# EAGLE board kinesis-advantage-v2 (EAGLE 6.3)
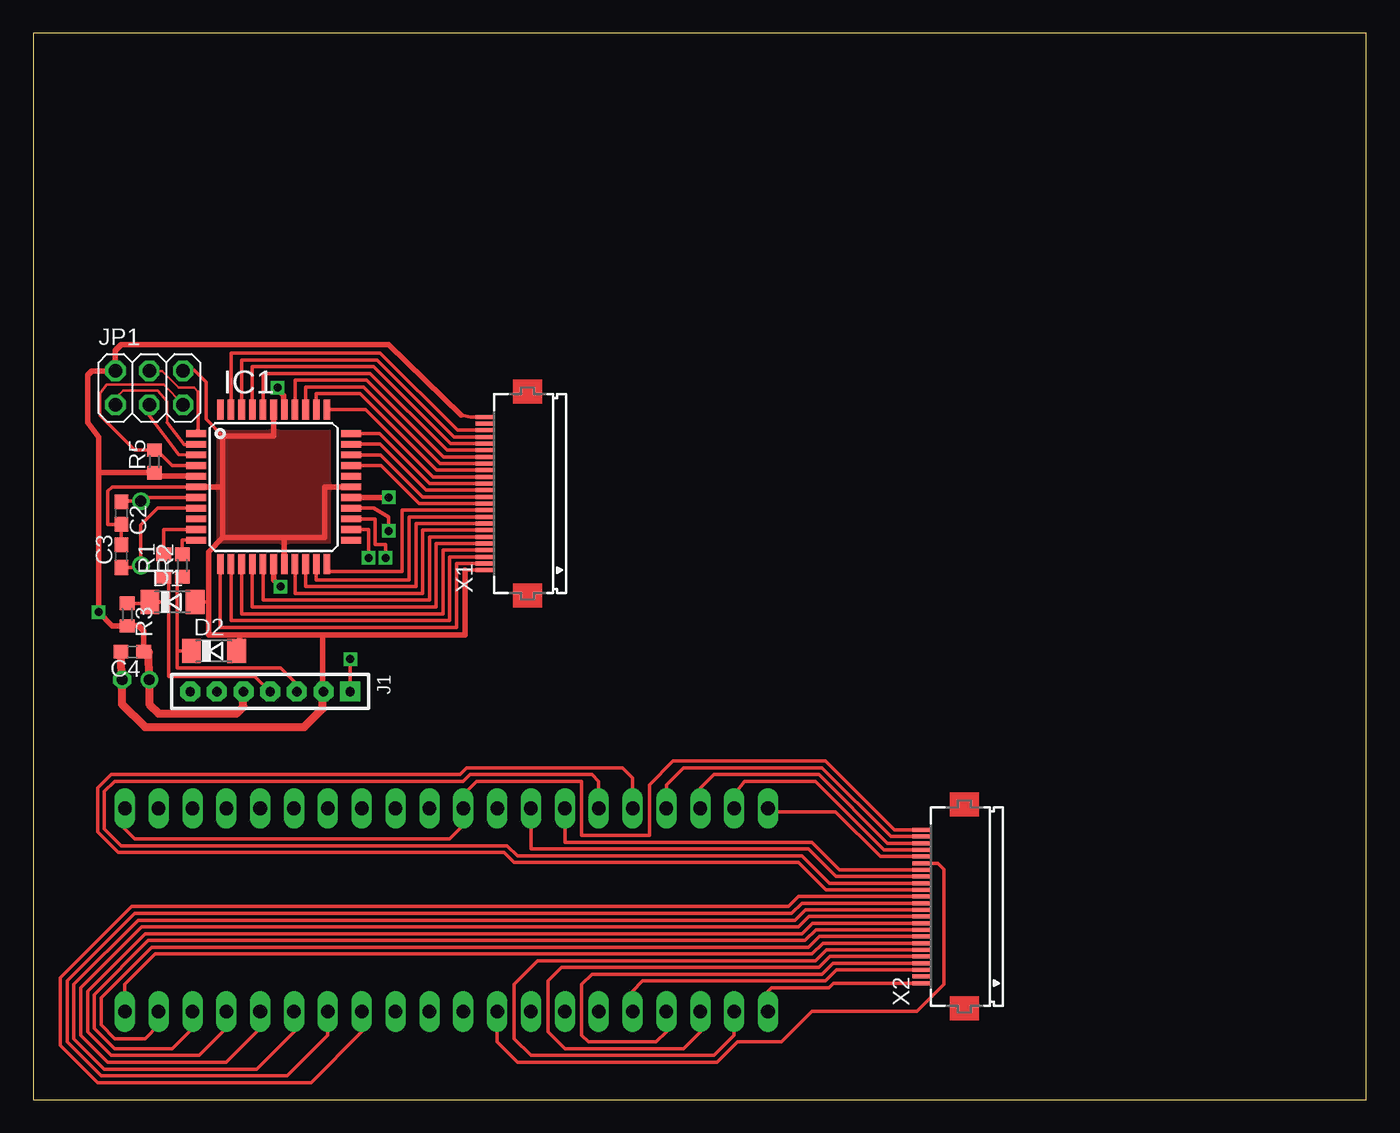
[diagram p0: board, top side]
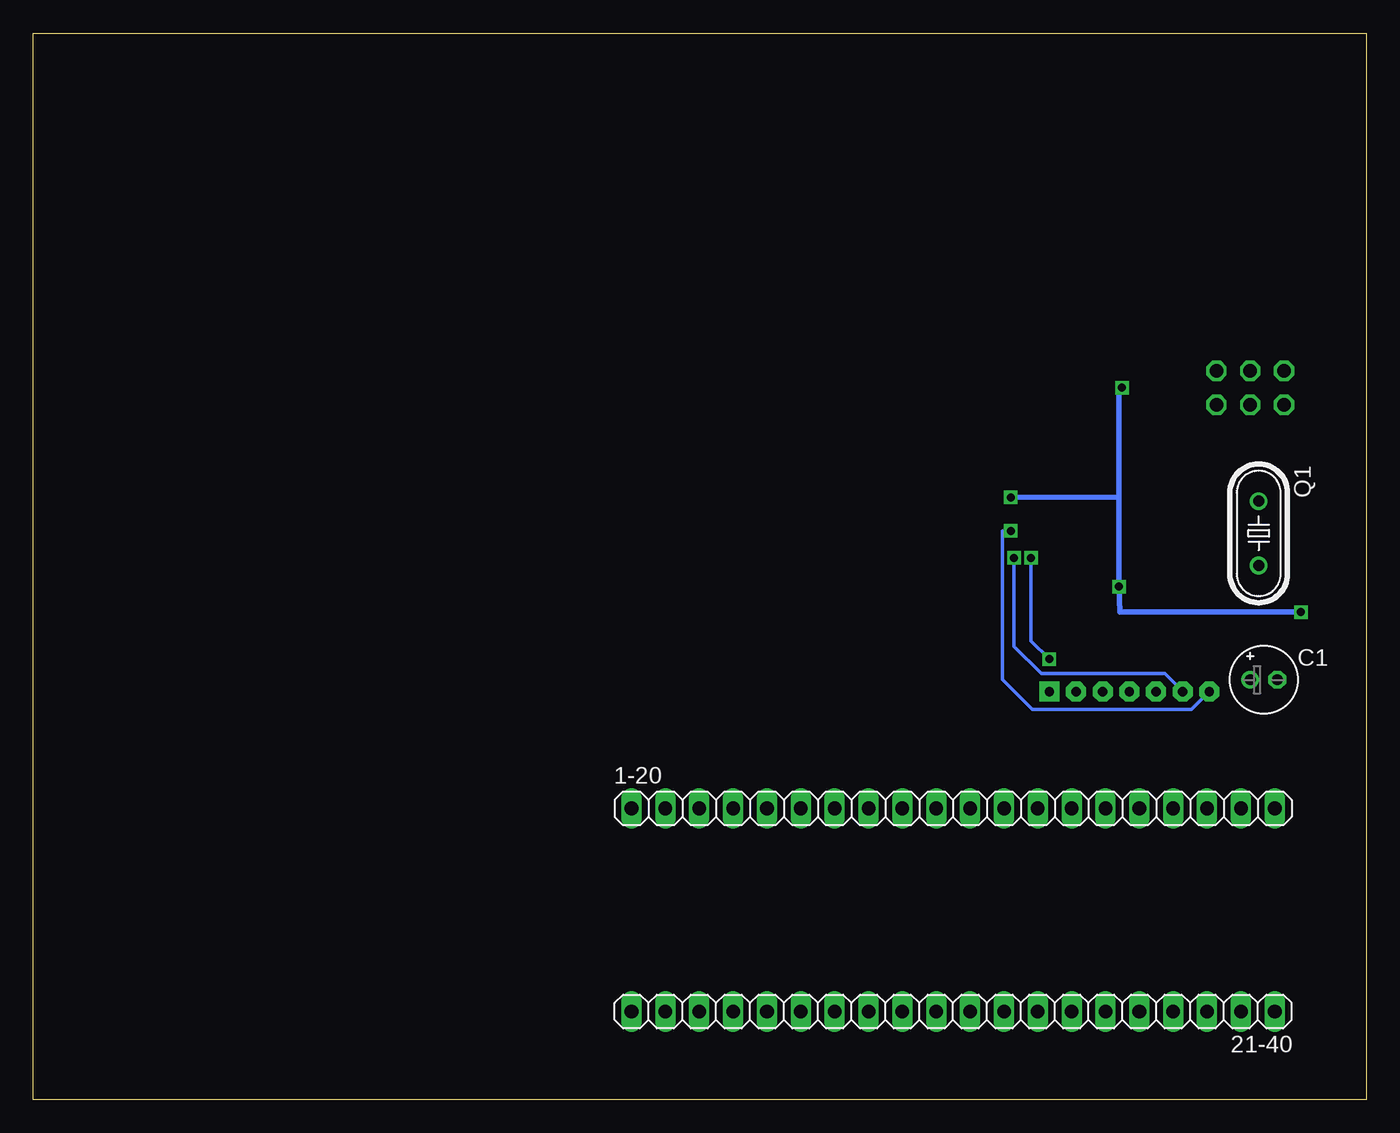
[diagram p1: board, bottom side, seen from below]

Size 100 x 80 mm. Coordinates in mm from the lower left corner, seen from the top.
Outline: 0,0 100,0 100,80 0,80 0,0
Copper layers (1*16): Top 0.035mm / dielectric 1.5mm / Bottom 0.035mm
Design rules "default *": minimum track width 8mil, minimum drill 12mil, track to track 6mil, track to pad 6mil, pad to pad 6mil, via to via 8mil, smd to smd 4mil, copper to edge 40mil, drill to drill 8mil, minimum pad ring 10mil, minimum via ring 8mil, stop-mask expansion 4mil, vias tented up to drill 0mil, thermal gap 10mil

## Footprints (pad centres in the part's own frame; a part is rotated, then mirrored left to right if it is on the bottom)
1X20 = drill 1.016 long: 1 -24.13,0; 2 -21.59,0; 3 -19.05,0; 4 -16.51,0; 5 -13.97,0; 6 -11.43,0; 7 -8.89,0; 8 -6.35,0; 9 -3.81,0; 10 -1.27,0; 11 1.27,0; 12 3.81,0; 13 6.35,0; 14 8.89,0; 15 11.43,0; 16 13.97,0; 17 16.51,0; 18 19.05,0; 19 21.59,0; 20 24.13,0
E2-5 = drill 0.813 pad 1.27: + -1.016,0 | drill 0.813 pad 1.27 octagon: - 1.016,0
C0603 = smd 1.1 x 1: 1 -0.85,0; 2 0.85,0
SOD80C = smd 1.4 x 1.8: A 1.7,0; C -1.7,0
TQFP44 = smd 1.5 x 0.5: 1 -5.8,4; 2 -5.8,3.2; 3 -5.8,2.4; 4 -5.8,1.6; 5 -5.8,0.8; 6 -5.8,0; 7 -5.8,-0.8; 8 -5.8,-1.6; 9 -5.8,-2.4; 10 -5.8,-3.2; 11 -5.8,-4; 23 5.8,-4; 24 5.8,-3.2; 25 5.8,-2.4; 26 5.8,-1.6; 27 5.8,-0.8; 28 5.8,0; 29 5.8,0.8; 30 5.8,1.6; 31 5.8,2.4; 32 5.8,3.2; 33 5.8,4 | smd 0.5 x 1.5: 12 -4,-5.8; 13 -3.2,-5.8; 14 -2.4,-5.8; 15 -1.6,-5.8; 16 -0.8,-5.8; 17 0,-5.8; 18 0.8,-5.8; 19 1.6,-5.8; 20 2.4,-5.8; 21 3.2,-5.8; 22 4,-5.8; 34 4,5.8; 35 3.2,5.8; 36 2.4,5.8; 37 1.6,5.8; 38 0.8,5.8; 39 0,5.8; 40 -0.8,5.8; 41 -1.6,5.8; 42 -2.4,5.8; 43 -3.2,5.8; 44 -4,5.8
SIP-100-07-32 = drill 0.7 pad 1.5 square: 1 -7,0 | drill 0.7 pad 1.5 octagon: 2 -5,0; 3 -3,0; 4 -1,0; 5 1,0; 6 3,0; 7 5,0
2X03 = drill 1.016 octagon: 1 -2.54,-1.27; 2 -2.54,1.27; 3 0,-1.27; 4 0,1.27; 5 2.54,-1.27; 6 2.54,1.27
HC49/S = drill 0.813: 1 -2.413,0; 2 2.413,0
R0603 = smd 1 x 1.1: 1 -0.85,0; 2 0.85,0
FH12-24S-0.5SH = smd 0.3 x 1.3: 1 -5.75,3.25; 2 -5.25,3.25; 3 -4.75,3.25; 4 -4.25,3.25; 5 -3.75,3.25; 6 -3.25,3.25; 7 -2.75,3.25; 8 -2.25,3.25; 9 -1.75,3.25; 10 -1.25,3.25; 11 -0.75,3.25; 12 -0.25,3.25; 13 0.25,3.25; 14 0.75,3.25; 15 1.25,3.25; 16 1.75,3.25; 17 2.25,3.25; 18 2.75,3.25; 19 3.25,3.25; 20 3.75,3.25; 21 4.25,3.25; 22 4.75,3.25; 23 5.25,3.25; 24 5.75,3.25

## Placement (x,y rotation side)
1-20  1-20  [1X20]  30.99,21.84 0 bottom
21-40  21-40  [1X20]  30.99,6.6 180 bottom
C1  4u7  [E2-5]  7.68,31.5 0 bottom
C2  27p  [C0603]  6.6,44.01 270 top
C3  27p  [C0603]  6.6,40.77 90 top
C4  100n  [C0603]  7.43,33.59 180 top
D1  3.6v  [SOD80C]  10.44,37.34 0 top
D2  3.6v  [SOD80C]  13.55,33.66 0 top
IC1  MEGA16-A  [TQFP44]  18.03,45.97 0 top
J1  F-1X07-SIP-100-32  [SIP-100-07-32]  16.76,30.61 180 top
JP1  Programmer  [2X03]  8.7,53.4 0 top
Q1  16mhz  [HC49/S]  8.06,42.48 270 bottom
R1  68R  [R0603]  9.78,40.07 90 top
R2  68R  [R0603]  11.18,40.07 90 top
R3  1k5  [R0603]  7.05,36.39 270 top
R5  4k7  [R0603]  9.08,47.88 90 top
X1  FH12-24S-0.5SH  [FH12-24S-0.5SH]  37.08,45.47 90 top
X2  FH12-24S-0.5SH  [FH12-24S-0.5SH]  69.85,14.48 90 top

## Library data of the parts
1-20 21-40 JP1 = pinhead
C1-C4 R1-R3 R5 = rcl
D1 D2 = diode
IC1 = atmel; MPN: ATMEGA16-16AU; OC_FARNELL: 9171134; OC_NEWARK: 96K6515
J1 = con-headers-jp
Q1 = crystal; OC_FARNELL: 1667008; OC_NEWARK: unknown
X1 X2 = con-hirose; MPN: FH12-24S-0.5SH(55); OC_FARNELL: 1324552; OC_NEWARK: 34M6170

## Nets
BUZZER: IC1.16 X1.6
CAPS_LED: IC1.12 X1.2
CHIP-D+: IC1.11 R2.2
CHIP-D-: IC1.10 R1.2
D+: D2.C J1.3 R2.1
D-: D1.C J1.4 R1.1 R3.1
EEP_SCL: IC1.19 X1.7
EEP_SDA: IC1.20 X1.8
FS1: IC1.25 J1.6
FS2: IC1.26 J1.7
FS3: IC1.24 J1.1
GND: C1.- C2.2 C3.2 C4.2 D1.A D2.A IC1.6 IC1.18 IC1.28 IC1.39 J1.2 JP1.6 X1.1
KBD_BUZZER: 21-40.12 X2.19
KBD_CAPS_LED: 1-20.4 X2.23
KBD_EEP_SCL: 1-20.7 X2.18
KBD_EEP_SDA: 1-20.8 X2.17
KBD_GND: 1-20.10 1-20.20 X2.24
KBD_KPD: 1-20.5 X2.15
KBD_KPD_LED: 1-20.3 X2.22
KBD_MATRIX1: 21-40.1 X2.7
KBD_MATRIX2: 21-40.2 X2.8
KBD_MATRIX3: 21-40.3 X2.9
KBD_MATRIX4: 21-40.4 X2.10
KBD_MATRIX5: 21-40.5 X2.11
KBD_MATRIX6: 21-40.6 X2.12
KBD_MATRIX7: 21-40.7 X2.13
KBD_MATRIX8: 21-40.8 X2.14
KBD_NUM_LED: 1-20.1 X2.20
KBD_P138_A: 21-40.19 X2.6
KBD_P138_B: 21-40.18 X2.5
KBD_P138_C: 21-40.17 X2.4
KBD_P138_SEL: 21-40.16 X2.3
KBD_PGM: 1-20.6 X2.16
KBD_SCR_LED: 1-20.2 X2.21
KBD_VCC: 21-40.20 X2.1
KPD: IC1.22 X1.10
KPD_LED: IC1.13 X1.3
MATRIX1: IC1.37 X1.18
MATRIX2: IC1.36 X1.17
MATRIX3: IC1.35 X1.16
MATRIX4: IC1.34 X1.15
MATRIX5: IC1.33 X1.14
MATRIX6: IC1.32 X1.13
MATRIX7: IC1.31 X1.12
MATRIX8: IC1.30 X1.11
MISO: IC1.2 JP1.1
MOSI: IC1.1 JP1.4
NUM_LED: IC1.15 X1.5
P138_A: IC1.40 X1.19
P138_B: IC1.41 X1.20
P138_C: IC1.42 X1.21
P138_SEL: IC1.43 X1.22
PGM: IC1.21 X1.9
PIN9: C2.1 IC1.7 Q1.1
PIN10: C3.1 IC1.8 Q1.2
RST: IC1.4 JP1.5 R5.2
SCK: IC1.3 JP1.3
SCR_LED: IC1.14 X1.4
VCC: C1.+ C4.1 IC1.5 IC1.17 IC1.27 IC1.38 J1.5 JP1.2 R3.2 R5.1 X1.24

## Tracks (layer width: path | path; a pad name or v marks a point on that pad's centre or on a via)
BUZZER
  Top 0.254: 17.34,40.07 IC1.16 17.23,37.47 29.72,37.47 29.72,42.22 X1.6
CAPS_LED
  Top 0.254: X1.2 31.75,40.22 31.75,35.43 14.03,35.43 IC1.12
CHIP-D+
  Top 0.254: IC1.11 11.18,41.97 R2.2
CHIP-D-
  Top 0.254: R1.2 9.78,42.77 IC1.10
D+
  Top 0.254: 10.79,33.66 10.79,32.38 18.54,32.38 19.76,31.16 J1.3 | D2.C 10.79,33.66 | R2.1 10.79,39.22 10.79,33.66
D-
  Top 0.254: 10.16,37.34 D1.C 8.64,37.24 R3.1 | 10.16,37.34 10.16,31.75 16.62,31.75 J1.4 | R1.1 10.16,39.22 10.16,37.34
EEP_SCL
  Top 0.254: X1.7 29.21,42.72 29.21,37.97 19.63,37.97 IC1.19
EEP_SDA
  Top 0.254: X1.8 28.7,43.22 28.7,38.48 20.43,38.48 IC1.20
FS1  (via drill 0.6)
  Top 0.254: IC1.25 25.64,43.57 25.65,41.66 26.42,41.66 v26.42,40.64
  Bottom 0.254: v26.42,40.64 26.42,33.98 24.38,31.95 15.11,31.95 J1.6
FS2  (via drill 0.6)
  Top 0.254: IC1.26 25.53,44.37 26.67,43.69 v26.67,42.67
  Bottom 0.254: v26.67,42.67 27.3,42.67 27.3,31.52 25.04,29.26 13.13,29.26 11.79,30.61 J1.7
FS3  (via drill 0.6, 0.61)
  Top 0.254: IC1.24 25.15,42.77 v25.15,40.64 | v23.77,33.05 23.77,30.61 J1.1
  Bottom 0.254: v25.15,40.64 25.15,34.42 v23.77,33.05
GND
  Top 0.254: D1.A 13.14,37.34 | IC1.6 5.91,45.97 5.59,45.66 5.59,43.16 C2.2 C3.2 | 14.22,49.78 12.95,51.05 12.95,53.85 12.06,54.74 11.3,54.74 JP1.6 | X1.1 32.38,39.72 | D2.A 15.49,33.78
  Top 0.406: 21.72,34.86 32.38,34.86 32.38,39.72 | IC1.18 18.83,42.16 | 18.83,42.16 14.22,42.16 | 14.22,42.16 13.14,41.08 13.14,37.34 13.14,34.86 15.49,34.86 | IC1.6 14.22,45.97 | 14.22,45.97 14.22,42.16 | 14.22,45.97 14.22,49.78 18.03,49.78 IC1.39 | IC1.28 21.84,45.97 21.84,42.16 18.83,42.16 | 21.72,34.86 21.72,30.48 21.76,30.53 J1.2 | 21.72,34.86 15.49,34.86 | 15.49,33.78 15.49,34.86
  Top 0.61: 21.72,30.48 21.72,29.34 20.32,27.94 8.38,27.94 6.67,29.65 C1.- 6.58,32.6 C4.2
  pour Top (isolate 0.762): 22.67,41.34 13.46,41.34 13.53,50.74 22.73,50.8
KBD_BUZZER
  Top 0.254: X2.19 67.87,17.73 68.33,17.27 68.33,8.64 66.29,6.6 58.42,6.6 56.13,4.32 52.83,4.32 51.31,2.79 36.32,2.79 34.8,4.32 21-40.12
KBD_CAPS_LED
  Top 0.254: X2.23 64.35,19.73 59.18,24.89 48.77,24.89 47.5,23.62 1-20.4
KBD_EEP_SCL
  Top 0.254: X2.18 60.5,17.23 58.42,19.3 39.88,19.3 1-20.7
KBD_EEP_SDA
  Top 0.254: X2.17 60.23,16.73 58.17,18.8 37.34,18.8 1-20.8
KBD_GND
  Top 0.254: X2.24 64.61,20.23 59.44,25.4 48.01,25.4 46.23,23.62 46.23,19.81 41.15,19.81 41.15,23.88 33.27,23.88 32.26,22.86 1-20.10 32.26,20.57 31.24,19.56 7.62,19.56 6.86,20.32 1-20.20
KBD_KPD
  Top 0.254: X2.15 59.46,15.73 57.4,17.78 36.07,17.78 35.31,18.54 6.35,18.54 4.83,20.07 4.83,23.37 5.84,24.38 32,24.38 32.51,24.89 44.2,24.89 44.96,24.13 1-20.5
KBD_KPD_LED
  Top 0.254: X2.22 64.08,19.23 58.93,24.38 51.05,24.38 50.04,23.37 1-20.3
KBD_MATRIX1
  Top 0.254: X2.7 59.23,11.73 58.42,10.92 9.14,10.92 6.86,8.64 21-40.1
KBD_MATRIX2
  Top 0.254: X2.8 58.96,12.23 58.17,11.43 8.89,11.43 5.08,7.62 5.08,5.59 6.1,4.57 8.38,4.57 9.4,5.59 21-40.2
KBD_MATRIX3
  Top 0.254: X2.9 58.7,12.73 57.91,11.94 8.64,11.94 4.57,7.87 4.57,5.33 6.1,3.81 10.41,3.81 11.94,5.33 21-40.3
KBD_MATRIX4
  Top 0.254: X2.10 58.44,13.23 57.66,12.45 8.38,12.45 4.06,8.13 4.06,5.08 5.84,3.3 12.45,3.3 14.48,5.33 21-40.4
KBD_MATRIX5
  Top 0.254: X2.11 58.18,13.73 57.4,12.95 8.13,12.95 3.56,8.38 3.56,4.83 5.59,2.79 14.48,2.79 17.02,5.33 21-40.5
KBD_MATRIX6
  Top 0.254: X2.12 57.92,14.23 57.15,13.46 7.87,13.46 3.05,8.64 3.05,4.57 5.33,2.29 16.76,2.29 19.56,5.08 21-40.6
KBD_MATRIX7
  Top 0.254: X2.13 57.65,14.73 56.9,13.97 7.62,13.97 2.54,8.89 2.54,4.32 5.08,1.78 19.05,1.78 22.1,4.83 21-40.7
KBD_MATRIX8
  Top 0.254: X2.14 57.39,15.23 56.64,14.48 7.37,14.48 2.03,9.14 2.03,4.06 4.83,1.27 20.83,1.27 24.64,5.08 21-40.8
KBD_NUM_LED
  Top 0.254: X2.20 63.56,18.23 60.2,21.59 55.37,21.59 1-20.1
KBD_P138_A
  Top 0.254: X2.6 59.49,11.23 58.67,10.41 37.85,10.41 36.07,8.64 36.07,4.57 37.34,3.3 51.05,3.3 52.58,4.83 21-40.19
KBD_P138_B
  Top 0.254: X2.5 59.75,10.73 58.93,9.91 39.62,9.91 38.61,8.89 38.61,5.08 39.88,3.81 48.77,3.81 50.04,5.08 21-40.18
KBD_P138_C
  Top 0.254: X2.4 60.01,10.23 59.18,9.4 41.91,9.4 41.15,8.64 41.15,4.83 41.66,4.32 46.74,4.32 47.5,5.08 21-40.17
KBD_P138_SEL
  Top 0.254: X2.3 60.27,9.73 59.44,8.89 45.72,8.89 44.96,8.13 21-40.16
KBD_PGM
  Top 0.254: X2.16 59.72,16.23 57.66,18.29 36.32,18.29 35.56,19.05 6.6,19.05 5.33,20.32 5.33,23.11 6.1,23.88 32.26,23.88 32.77,24.38 41.91,24.38 42.42,23.88 1-20.6
KBD_SCR_LED
  Top 0.254: X2.21 63.82,18.73 58.67,23.88 53.34,23.88 52.58,22.86 1-20.2
KBD_VCC
  Top 0.254: X2.1 60.04,8.73 59.69,8.38 55.37,8.38 55.12,8.13 21-40.20
KPD
  Top 0.254: X1.10 27.69,44.22 27.69,39.62 22.03,39.62 IC1.22
KPD_LED
  Top 0.254: X1.3 31.24,40.72 31.24,35.94 14.83,35.94 IC1.13
MATRIX1
  Top 0.254: X1.18 30.78,48.22 25.02,53.98 19.63,53.98 IC1.37
MATRIX2
  Top 0.254: X1.17 30.52,47.72 24.77,53.47 20.43,53.47 IC1.36
MATRIX3
  Top 0.254: IC1.35 21.23,52.96 24.51,52.96 30.25,47.22 X1.16
MATRIX4
  Top 0.254: IC1.34 24.93,51.77 29.99,46.72 X1.15
MATRIX5
  Top 0.254: IC1.33 25.97,49.97 29.73,46.22 X1.14
MATRIX6
  Top 0.254: IC1.32 26.01,49.17 29.47,45.72 X1.13
MATRIX7
  Top 0.254: IC1.31 26.05,48.37 29.21,45.21 29.21,45.22 X1.12
MATRIX8
  Top 0.254: IC1.30 26.09,47.57 28.96,44.7 28.97,44.72 X1.11
MISO
  Top 0.203: JP1.1 6.16,52.64 6.73,53.19 9.34,53.19 10.03,52.36 10.03,50.8
  Top 0.254: IC1.2 12.21,49.15 11.3,49.15 10.03,50.8
MOSI
  Top 0.203: JP1.4 9.65,54.67 10.92,53.4 12.06,53.4 12.38,53.09
  Top 0.254: 12.19,50.04 IC1.1 12.38,50.33 12.38,53.09
NUM_LED
  Top 0.254: X1.5 30.23,41.72 30.23,36.96 16.43,36.96 IC1.15
P138_A
  Top 0.254: X1.19 31.04,48.72 25.27,54.48 17.23,54.48 IC1.40
P138_B
  Top 0.254: X1.20 31.3,49.22 25.53,54.99 16.43,54.99 IC1.41
P138_C
  Top 0.254: X1.21 31.56,49.72 25.78,55.5 15.63,55.5 IC1.42
P138_SEL
  Top 0.254: X1.22 31.83,50.22 26.04,56.01 14.83,56.01 IC1.43
PGM
  Top 0.254: X1.9 28.19,43.72 28.19,38.99 21.23,38.99 IC1.21
PIN9
  Top 0.254: IC1.7 8.06,45.17 Q1.1 6.77,44.9 C2.1
PIN10
  Top 0.254: IC1.8 9.32,44.37 8.06,43.12 Q1.2 7.91,39.92 C3.1
RST
  Top 0.203: JP1.5 9.78,53.65 5.51,53.65 5.02,53.02 5.02,51.31
  Top 0.254: IC1.4 10.4,47.57 9.25,48.73 R5.2 7.6,48.73 5.02,51.31
SCK
  Top 0.254: JP1.3 8.7,51.31 10.92,48.39 11.63,48.37 IC1.3
SCR_LED
  Top 0.254: X1.4 30.73,41.22 30.73,36.45 15.63,36.45 IC1.14
VCC  (via drill 0.6)
  Top 0.254: 32.1,51.34 32.82,51.22 X1.24
  Top 0.406: IC1.17 18.03,38.99 v18.54,38.48 | IC1.27 v26.67,45.17 | IC1.38 18.8,52.83 18.33,53.3 v18.33,53.4 | IC1.5 9.24,46.77 R5.1 5.18,47.03 4.89,46.99 | 32.1,51.34 26.67,56.64 6.6,56.64 6.16,56.2 JP1.2 4.38,54.67 4.06,54.36 4.06,50.8 4.89,49.72 4.89,46.99 | 4.89,46.99 v4.89,36.58 5.93,35.53 R3.2 7.07,35.56 7.87,35.56 8.28,35.15 C4.1
  Top 0.61: J1.5 15.75,30.21 15.75,29.46 15.24,28.96 9.4,28.96 8.7,29.65 C1.+ 8.66,33.57 C4.1
  Bottom 0.406: v4.89,36.58 18.48,36.58 v18.54,38.48 18.54,45.21 | v26.67,45.17 26.76,45.17 18.54,45.21 | v18.33,53.4 18.33,53.3 18.54,53.09 18.54,45.21